# Altium PCB slave.PcbDoc (part 8 of 8)
Units mm, origin at the board's own origin, x right, y up, seen from the top; angles counter-clockwise.
Board outline 160 x 100 mm, 6 copper layers (Top, FUSED_VBAT-, Signals1, Signals2, SUPPLY, Bottom), stack 1.67 mm thick; 582 components, 375 nets, 1615 pads, 3043 vias.
Unrouted connection lines stored in the file: 1.
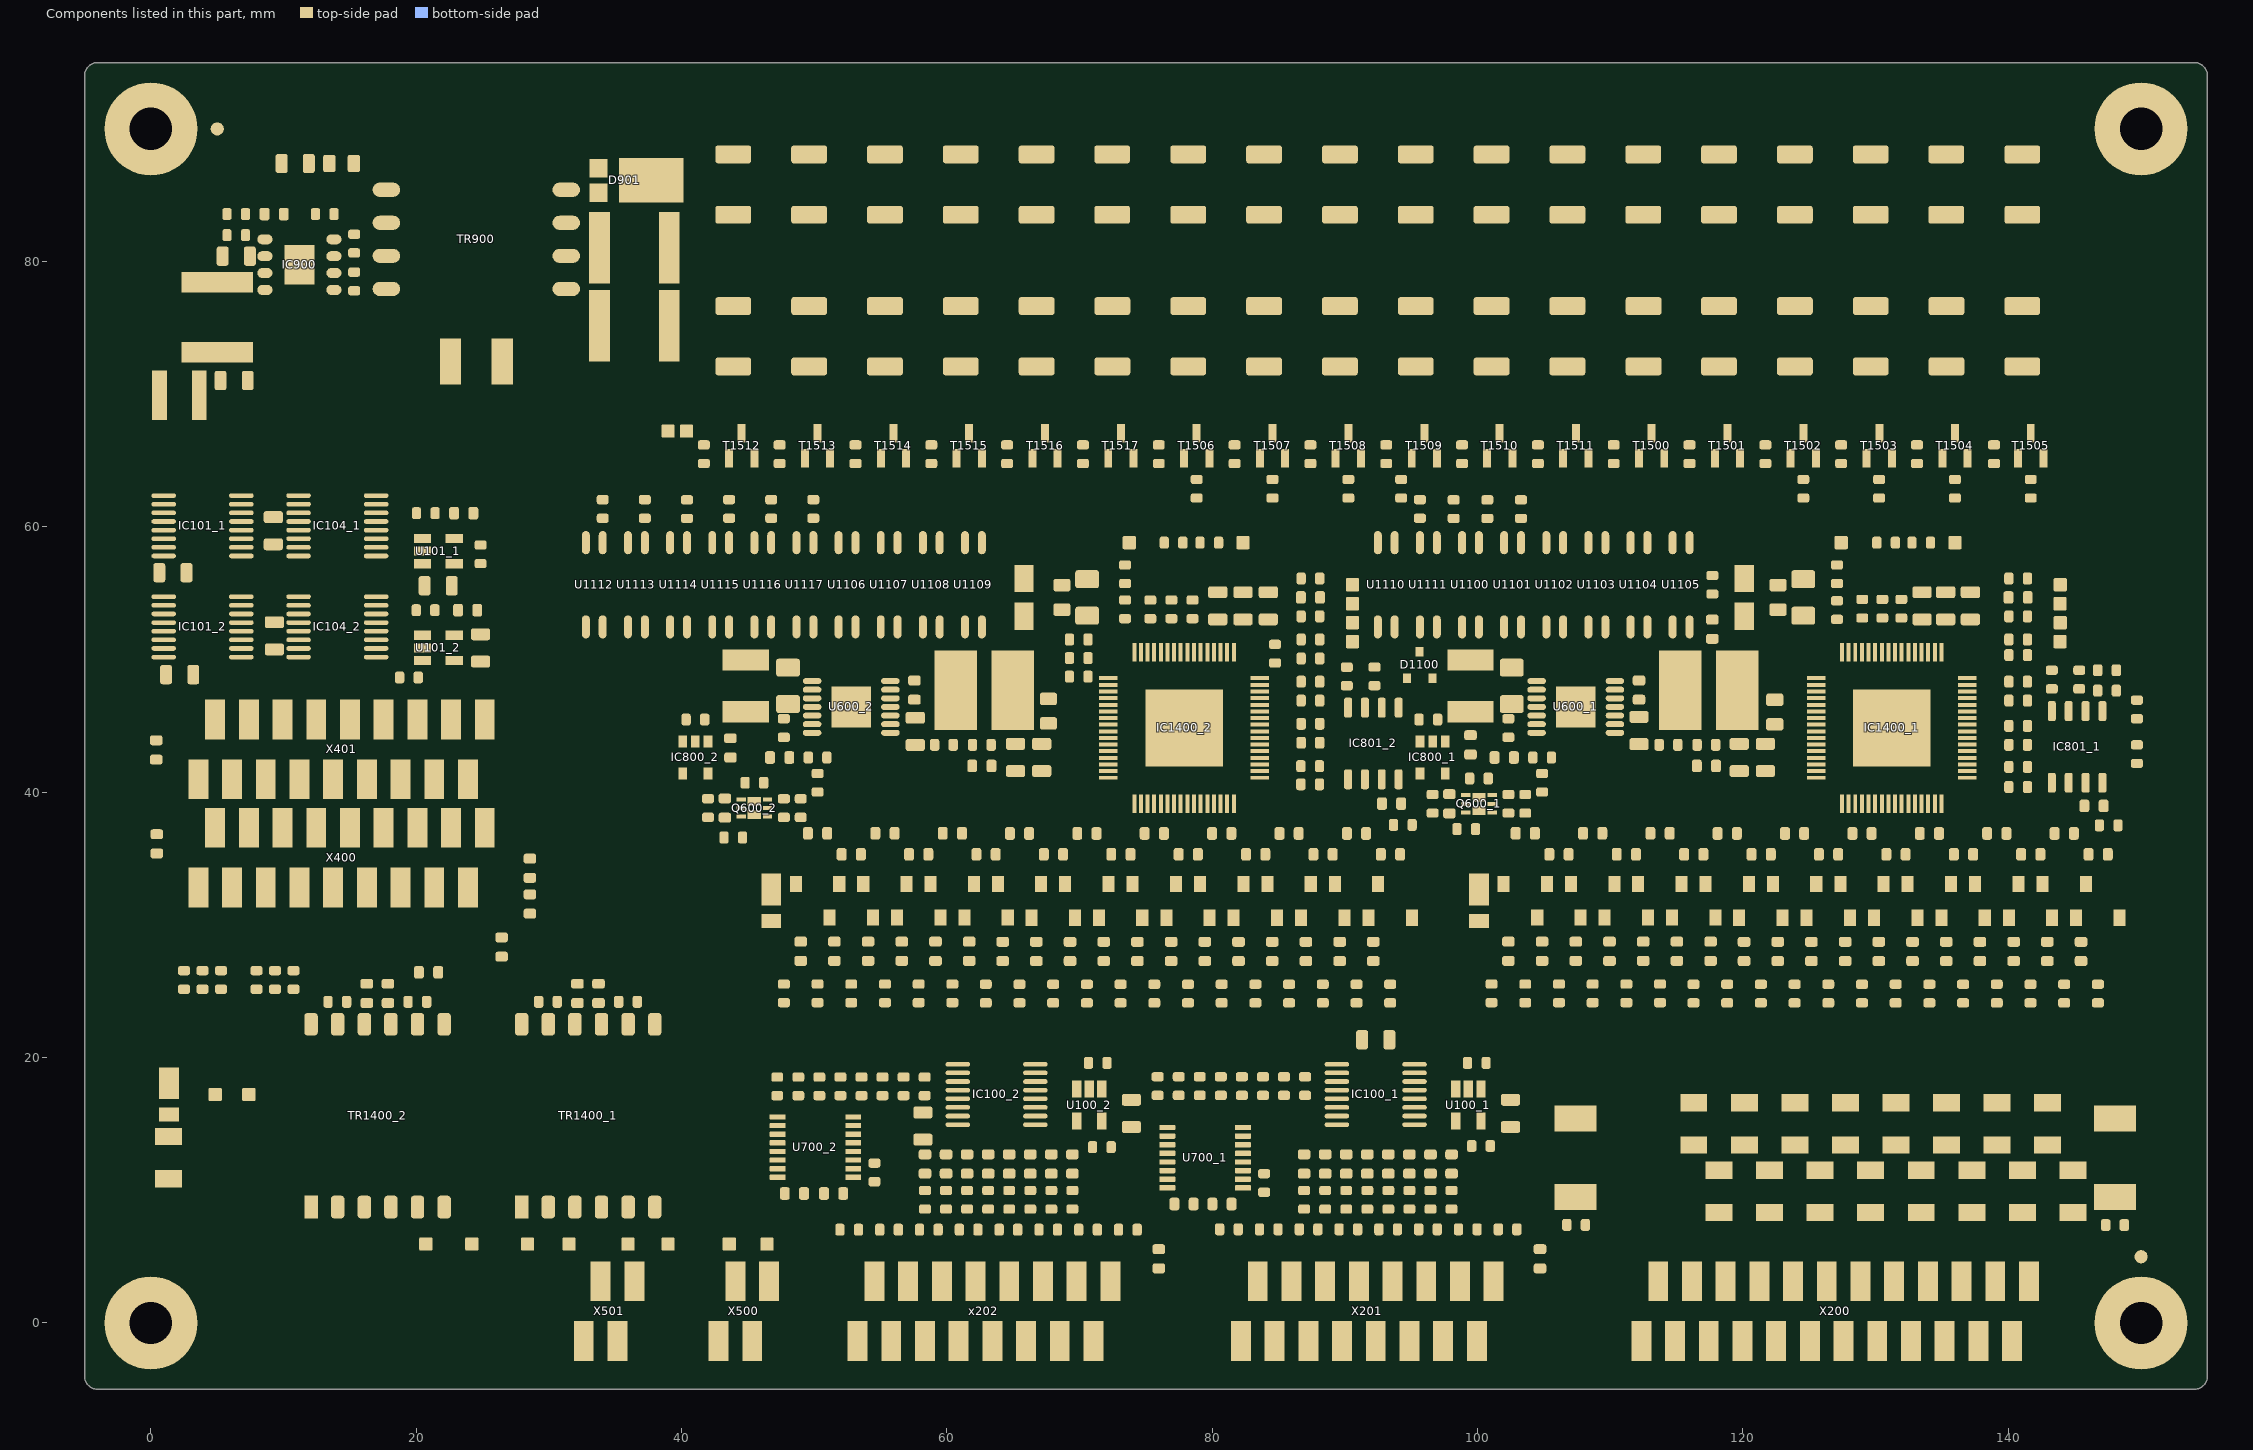
[diagram p11: the components of this part, seen from the top]

## Via types
v1: diameter 0.55, hole 0.3, Top to Bottom, tented both sides, 2963 vias
v2: diameter 0.55, hole 0.3, Top to Bottom, 41 vias
v3: diameter 0.75, hole 0.5, Top to Bottom, tented both sides, 22 vias
v4: diameter 0.65, hole 0.4, Top to Bottom, tented both sides, 16 vias
v5: diameter 0.75, hole 0.5, Top to Bottom, 1 vias

## Nets (pads, with @x,y where several pads share a name; then routed paths per layer and width w, separated by ;. In a path a pad name is that pad's centre, name@x,y a point inside that pad or via, vN(x,y) a via of type N, cw(c..) or ccw(c..) an arc to the next point about the centre after c; other vN are vias at no path point) (continued)
copper on no net:
  other v1: 41.996,75.51 42.758,75.51 45.044,75.51 48.092,75.51 48.854,75.51 41.996,77.034 42.377,77.796 43.139,77.796 43.901,77.796 44.663,77.796 45.425,77.796 48.473,77.796 49.235,77.796 49.997,77.796 50.759,77.796 51.521,77.796 41.996,78.558 42.758,78.558 43.52,78.558 44.282,78.558 45.044,78.558 45.806,78.558 48.092,78.558 48.854,78.558 49.616,78.558 50.378,78.558 51.14,78.558 42.377,79.32 43.139,79.32 43.901,79.32 44.663,79.32 45.425,79.32 48.473,79.32 49.235,79.32 49.997,79.32 50.759,79.32 51.521,79.32 41.996,80.082 42.758,80.082 43.52,80.082 44.282,80.082 45.044,80.082 45.806,80.082 48.092,80.082 48.854,80.082 49.616,80.082 50.378,80.082 51.14,80.082 42.377,80.844 43.139,80.844 43.901,80.844 44.663,80.844 45.425,80.844 48.473,80.844 49.235,80.844 49.997,80.844 50.759,80.844 51.521,80.844 41.996,81.606 42.758,81.606 43.52,81.606 44.282,81.606 45.044,81.606 45.806,81.606 48.092,81.606 48.854,81.606 49.616,81.606 50.378,81.606 51.14,81.606 42.377,82.368 43.139,82.368 43.901,82.368 44.663,82.368 45.425,82.368 48.473,82.368 49.235,82.368 49.997,82.368 50.759,82.368 51.521,82.368 41.996,83.13 45.806,83.13 51.521,83.892 41.996,84.654 42.758,84.654 43.52,84.654 44.282,84.654 45.044,84.654 45.806,84.654 48.092,84.654 48.854,84.654 49.616,84.654 50.378,84.654 51.14,84.654

## Polygon pours and split planes (outlines as drawn)
+5.0V_VREG_2 on SUPPLY "Polygon_1_Net_+5.0V_VREG_1" (solid, remove dead copper, pour order 222): 0.086,27.06 12.151,27.06 47.076,27.06 47.076,8.962 50.886,8.962 50.886,-5.008 74.381,-5.008 74.381,26.742 95.653,26.742 95.653,58.81 43.901,58.81 43.901,29.6 0.086,29.6
+5.0V_VREG_1 on SUPPLY "Polygon_1_Net_+5.0V_VREG_0" (solid, remove dead copper, pour order 223): 17 vertices, not listed, extent 0.086,-5.193 155.39,64.262
+5.0V_VREG_2 on SUPPLY "SUPPLY-+5.0V_VREG_1" (solid, pour order 811): 0.086,54.682 27.708,54.682 27.708,48.332 39.773,48.332 39.773,40.712 0.086,40.712
FUSED_VBAT- on Top "Top-FUSED_VBAT-" (solid, pour order 787): 18 vertices, not listed, extent 42.631,39.76 68.031,50.872
VIN_2 on Top "Top-EXT_DC_ISO+" (solid, pour order 789): 42.631,47.38 50.568,47.38 50.568,46.745 48.663,46.745 48.663,45.157 42.631,45.157
no net on Top "Polygon_1_Net_N$4" (solid, pour order 381): 52.156,85.162 52.156,75.002 47.076,75.002 47.076,85.162
FUSED_VBAT- on Top "Top-FUSED_VBAT-" (solid, pour order 807): 18 vertices, not listed, extent 97.241,39.76 122.641,50.872
no net on Top "Polygon_1_Net_N$4" (solid, pour order 383): 46.441,85.162 46.441,75.002 41.361,75.002 41.361,85.162
NetC605_1_2 on Top "Top-NetC1505_2_2" (solid, pour order 803): 119.466,44.205 120.736,44.205 120.736,45.792 123.276,45.792 123.276,43.252 119.466,43.252
EXT_DC_ISO+ on Top "Polygon_1_Net_EXT_DC_ISO+" (solid, pour order 755): 40.408,88.655 40.408,68.652 35.963,68.652 35.963,84.527 35.328,84.527 35.328,88.655
NetC900_2 on Top "Polygon_1_Net_N$74" (solid, remove dead copper, pour order 779): 5.801,71.827 5.801,67.858 2.943,67.858 2.943,71.827
NetC902_2 on Top "Polygon_1_Net_N$1254" (solid, remove dead copper, pour order 761): 21 vertices, not listed, extent -0.232,67.858 18.818,88.337
FUSED_VBAT- on Top "Polygon_2_Net_FUSED_VBAT-" (solid, pour order 759): 34.693,83.892 34.693,68.652 25.486,68.652 25.486,74.367 29.931,74.367 29.931,78.812 33.106,78.812 33.106,83.892
EXT_DC_IN- on Top "Polygon_1_Net_EXT_DC_IN-" (solid, remove dead copper, pour order 753): 9.928,78.495 9.928,84.21 12.405,84.21 12.405,74.685 23.581,74.685 23.581,70.24 6.277,70.24 6.277,72.145 2.15,72.145 2.15,75.796 8.023,75.796 8.023,78.495
+5.0V_VREG_2 on Top "Top-+5.0V_VREG_1" (solid, pour order 797): 62.951,50.872 62.951,41.347 63.903,41.347 63.903,44.522 65.808,44.522 65.808,46.427 68.666,46.427 68.666,50.872
EXT_DC_ISO+ on Top "Top-EXT_DC_ISO+ 1" (solid, pour order 821): 41.376,40.077 44.218,40.077 44.218,41.347 45.171,41.347 45.171,40.077 44.853,40.077 44.853,39.125 41.376,39.125
VIN_2 on Top "Top-VIN_2" (solid, pour order 823): 44.945,39.76 45.488,39.76 45.488,41.347 47.076,41.347 47.076,39.125 46.123,39.125 46.123,38.807 44.945,38.807
EXT_DC_ISO+ on Top "Top-EXT_DC_ISO+ 2" (solid, pour order 819): 95.986,40.395 98.828,40.395 98.828,41.665 99.781,41.665 99.781,40.395 99.463,40.395 99.463,39.442 95.986,39.442
VIN_1 on Top "Top-VIN_1" (solid, pour order 817): 99.555,40.077 100.098,40.077 100.098,41.665 101.686,41.665 101.686,39.442 100.733,39.442 100.733,39.125 99.555,39.125
VIN_1 on Top "Top-EXT_DC_ISO+" (solid, pour order 799): 97.241,47.38 105.178,47.38 105.178,46.745 103.273,46.745 103.273,45.157 97.241,45.157 97.241,46.745
+5.0V_VREG_1 on Top "Top-+5.0V_VREG_1" (solid, pour order 801): 117.561,50.872 117.561,41.347 118.513,41.347 118.513,44.522 120.418,44.522 120.418,46.427 123.276,46.427 123.276,50.872
SW_2 on Top "Top-SW_2" (solid, pour order 815): 55.013,48.967 58.823,48.967 58.823,50.872 61.681,50.872 61.681,44.522 58.823,44.522 58.823,47.697 56.601,47.697 56.601,46.745 55.013,46.745
SW_1 on Top "Top-SW_2" (solid, pour order 805): 109.623,48.967 113.433,48.967 113.433,50.872 116.291,50.872 116.291,44.522 113.433,44.522 113.433,47.697 111.211,47.697 111.211,46.745 109.623,46.745
CELL_FEEDBACK.CELL17_FEEDBACK+ on Top "Polygon_1_Net_CELL0_FEEDBACK+" (solid, pour order 417): 46.441,66.747 41.361,66.747 41.361,73.732 46.441,73.732
NetC605_2_2 on Top "Top-NetC1505_2_2" (solid, pour order 793): 64.856,44.205 66.126,44.205 66.126,45.792 68.666,45.792 68.666,43.252 64.856,43.252
NetIC900_5 on Top "Polygon_1_Net_N$80" (solid, remove dead copper, pour order 763): 21.358,76.59 21.358,88.337 14.691,88.337 14.691,86.432 19.453,86.432 19.453,81.352 16.596,81.352 16.596,78.495 13.103,78.495 13.103,76.59
NetD901_2 on Top "Polygon_1_Net_N$84" (solid, remove dead copper, pour order 757): 34.376,88.655 34.376,84.527 29.931,84.527 29.931,88.655
NetC905_1 on Top "Polygon_1_Net_N$92" (solid, remove dead copper, pour order 751): 11.198,88.337 11.198,86.432 14.056,86.432 14.056,88.337
NetTR900_6 on Top "Polygon_1_Net_N$74" (solid, remove dead copper, pour order 745): 32.471,83.892 32.471,79.447 29.931,79.447 29.931,83.892
CELL_FEEDBACK.CELL0_FEEDBACK+ on Top "Polygon_1_Net_FUSED_CELL_0-" (solid, pour order 193): 143.596,86.432 138.516,86.432 138.516,93.417 143.596,93.417
FUSED_CELL.CELL_12+ on Top "Polygon_1_Net_N$4" (solid, pour order 375): 69.301,85.162 69.301,75.002 64.221,75.002 64.221,85.162
CELL_FEEDBACK.CELL1_FEEDBACK+ on Top "Polygon_1_Net_CELL0_FEEDBACK+" (solid, pour order 385): 137.881,66.747 132.801,66.747 132.801,73.732 137.881,73.732
CELL_FEEDBACK.CELL0_FEEDBACK+ on Top "Polygon_1_Net_CELL0_FEEDBACK+" (solid, pour order 185): 143.596,66.747 138.516,66.747 138.516,73.732 143.596,73.732
CELL_FEEDBACK.CELL16_FEEDBACK+ on Top "Polygon_1_Net_CELL0_FEEDBACK+" (solid, pour order 415): 52.156,66.747 47.076,66.747 47.076,73.732 52.156,73.732
FUSED_CELL.CELL_0- on Top "Polygon_1_Net_N$4" (solid, pour order 214): 143.596,85.162 143.596,75.002 138.516,75.002 138.516,85.162
CELL_FEEDBACK.CELL13_FEEDBACK+ on Top "Polygon_1_Net_CELL0_FEEDBACK+" (solid, pour order 409): 69.301,66.747 64.221,66.747 64.221,73.732 69.301,73.732
CELL_FEEDBACK.CELL14_FEEDBACK+ on Top "Polygon_1_Net_CELL0_FEEDBACK+" (solid, pour order 411): 63.586,66.747 58.506,66.747 58.506,73.732 63.586,73.732
CELL_FEEDBACK.CELL12_FEEDBACK+ on Top "Polygon_1_Net_CELL0_FEEDBACK+" (solid, pour order 407): 75.016,66.747 69.936,66.747 69.936,73.732 75.016,73.732
CELL_FEEDBACK.CELL11_FEEDBACK+ on Top "Polygon_1_Net_CELL0_FEEDBACK+" (solid, pour order 405): 80.731,66.747 75.651,66.747 75.651,73.732 80.731,73.732
CELL_FEEDBACK.CELL9_FEEDBACK+ on Top "Polygon_1_Net_CELL0_FEEDBACK+" (solid, pour order 401): 92.161,66.747 87.081,66.747 87.081,73.732 92.161,73.732
CELL_FEEDBACK.CELL8_FEEDBACK+ on Top "Polygon_1_Net_CELL0_FEEDBACK+" (solid, pour order 399): 97.878,66.747 92.798,66.747 92.798,73.732 97.878,73.732
CELL_FEEDBACK.CELL7_FEEDBACK+ on Top "Polygon_1_Net_CELL0_FEEDBACK+" (solid, pour order 397): 103.591,66.747 98.511,66.747 98.511,73.732 103.591,73.732
CELL_FEEDBACK.CELL6_FEEDBACK+ on Top "Polygon_1_Net_CELL0_FEEDBACK+" (solid, pour order 395): 109.309,66.747 104.229,66.747 104.229,73.732 109.309,73.732
CELL_FEEDBACK.CELL5_FEEDBACK+ on Top "Polygon_1_Net_CELL0_FEEDBACK+" (solid, pour order 393): 115.021,66.747 109.941,66.747 109.941,73.732 115.021,73.732
CELL_FEEDBACK.CELL4_FEEDBACK+ on Top "Polygon_1_Net_CELL0_FEEDBACK+" (solid, pour order 391): 120.736,66.747 115.656,66.747 115.656,73.732 120.736,73.732
CELL_FEEDBACK.CELL3_FEEDBACK+ on Top "Polygon_1_Net_CELL0_FEEDBACK+" (solid, pour order 389): 126.451,66.747 121.371,66.747 121.371,73.732 126.451,73.732
CELL_FEEDBACK.CELL2_FEEDBACK+ on Top "Polygon_1_Net_CELL0_FEEDBACK+" (solid, pour order 387): 132.166,66.747 127.086,66.747 127.086,73.732 132.166,73.732
CELL_FEEDBACK.CELL15_FEEDBACK+ on Top "Polygon_1_Net_CELL0_FEEDBACK+" (solid, pour order 413): 57.871,66.747 52.791,66.747 52.791,73.732 57.871,73.732
CELL_FEEDBACK.CELL10_FEEDBACK+ on Top "Polygon_1_Net_CELL0_FEEDBACK+" (solid, pour order 403): 86.446,66.747 81.366,66.747 81.366,73.732 86.446,73.732
FUSED_CELL.CELL_14+ on Top "Polygon_1_Net_N$4" (solid, pour order 379): 57.871,85.162 57.871,75.002 52.791,75.002 52.791,85.162
FUSED_CELL.CELL_13+ on Top "Polygon_1_Net_N$4" (solid, pour order 377): 63.586,85.162 63.586,75.002 58.506,75.002 58.506,85.162
FUSED_CELL.CELL_11+ on Top "Polygon_1_Net_N$4" (solid, pour order 373): 75.016,85.162 75.016,75.002 69.936,75.002 69.936,85.162
FUSED_CELL.CELL_10+ on Top "Polygon_1_Net_N$4" (solid, pour order 371): 80.731,85.162 80.731,75.002 75.651,75.002 75.651,85.162
FUSED_CELL.CELL_9+ on Top "Polygon_1_Net_N$4" (solid, pour order 369): 86.446,85.162 86.446,75.002 81.366,75.002 81.366,85.162
FUSED_CELL.CELL_8+ on Top "Polygon_1_Net_N$4" (solid, pour order 367): 92.161,85.162 92.161,75.002 87.081,75.002 87.081,85.162
FUSED_CELL.CELL_7+ on Top "Polygon_1_Net_N$4" (solid, pour order 365): 97.876,85.162 97.876,75.002 92.796,75.002 92.796,85.162
FUSED_CELL.CELL_6+ on Top "Polygon_1_Net_N$4" (solid, pour order 363): 103.591,85.162 103.591,75.002 98.511,75.002 98.511,85.162
FUSED_CELL.CELL_5+ on Top "Polygon_1_Net_N$4" (solid, pour order 361): 109.309,85.162 109.309,75.002 104.229,75.002 104.229,85.162
FUSED_CELL.CELL_4+ on Top "Polygon_1_Net_N$4" (solid, pour order 359): 115.021,85.162 115.021,75.002 109.941,75.002 109.941,85.162
FUSED_CELL.CELL_3+ on Top "Polygon_1_Net_N$4" (solid, pour order 357): 120.736,85.162 120.736,75.002 115.656,75.002 115.656,85.162
FUSED_CELL.CELL_2+ on Top "Polygon_1_Net_N$4" (solid, pour order 355): 126.451,85.162 126.451,75.002 121.371,75.002 121.371,85.162
FUSED_CELL.CELL_1+ on Top "Polygon_1_Net_N$4" (solid, pour order 353): 132.166,85.162 132.166,75.002 127.086,75.002 127.086,85.162
FUSED_CELL.CELL_0+ on Top "Polygon_1_Net_N$4" (solid, pour order 351): 137.881,85.162 137.881,75.002 132.801,75.002 132.801,85.162
CELL_FEEDBACK.CELL17_FEEDBACK+ on Top "Polygon_1_Net_FUSED_CELL_0-" (solid, pour order 349): 46.441,86.432 41.361,86.432 41.361,93.417 46.441,93.417
CELL_FEEDBACK.CELL16_FEEDBACK+ on Top "Polygon_1_Net_FUSED_CELL_0-" (solid, pour order 347): 52.156,86.432 47.076,86.432 47.076,93.417 52.156,93.417
CELL_FEEDBACK.CELL15_FEEDBACK+ on Top "Polygon_1_Net_FUSED_CELL_0-" (solid, pour order 345): 57.871,86.432 52.791,86.432 52.791,93.417 57.871,93.417
CELL_FEEDBACK.CELL14_FEEDBACK+ on Top "Polygon_1_Net_FUSED_CELL_0-" (solid, pour order 343): 63.586,86.432 58.506,86.432 58.506,93.417 63.586,93.417
CELL_FEEDBACK.CELL13_FEEDBACK+ on Top "Polygon_1_Net_FUSED_CELL_0-" (solid, pour order 341): 69.301,86.432 64.221,86.432 64.221,93.417 69.301,93.417
CELL_FEEDBACK.CELL12_FEEDBACK+ on Top "Polygon_1_Net_FUSED_CELL_0-" (solid, pour order 339): 75.016,86.432 69.936,86.432 69.936,93.417 75.016,93.417
CELL_FEEDBACK.CELL11_FEEDBACK+ on Top "Polygon_1_Net_FUSED_CELL_0-" (solid, pour order 337): 80.731,86.432 75.651,86.432 75.651,93.417 80.731,93.417
CELL_FEEDBACK.CELL10_FEEDBACK+ on Top "Polygon_1_Net_FUSED_CELL_0-" (solid, pour order 335): 86.446,86.432 81.366,86.432 81.366,93.417 86.446,93.417
CELL_FEEDBACK.CELL9_FEEDBACK+ on Top "Polygon_1_Net_FUSED_CELL_0-" (solid, pour order 333): 92.161,86.432 87.081,86.432 87.081,93.417 92.161,93.417
CELL_FEEDBACK.CELL8_FEEDBACK+ on Top "Polygon_1_Net_FUSED_CELL_0-" (solid, pour order 331): 97.876,86.432 92.796,86.432 92.796,93.417 97.876,93.417
CELL_FEEDBACK.CELL7_FEEDBACK+ on Top "Polygon_1_Net_FUSED_CELL_0-" (solid, pour order 329): 103.591,86.432 98.511,86.432 98.511,93.417 103.591,93.417
CELL_FEEDBACK.CELL6_FEEDBACK+ on Top "Polygon_1_Net_FUSED_CELL_0-" (solid, pour order 327): 109.306,86.432 104.226,86.432 104.226,93.417 109.306,93.417
CELL_FEEDBACK.CELL5_FEEDBACK+ on Top "Polygon_1_Net_FUSED_CELL_0-" (solid, pour order 325): 115.021,86.432 109.941,86.432 109.941,93.417 115.021,93.417
CELL_FEEDBACK.CELL4_FEEDBACK+ on Top "Polygon_1_Net_FUSED_CELL_0-" (solid, pour order 323): 120.736,86.432 115.656,86.432 115.656,93.417 120.736,93.417
CELL_FEEDBACK.CELL3_FEEDBACK+ on Top "Polygon_1_Net_FUSED_CELL_0-" (solid, pour order 321): 126.451,86.432 121.371,86.432 121.371,93.417 126.451,93.417
CELL_FEEDBACK.CELL2_FEEDBACK+ on Top "Polygon_1_Net_FUSED_CELL_0-" (solid, pour order 319): 132.166,86.432 127.086,86.432 127.086,93.417 132.166,93.417
CELL_FEEDBACK.CELL1_FEEDBACK+ on Top "Polygon_1_Net_FUSED_CELL_0-" (solid, pour order 317): 137.881,86.432 132.801,86.432 132.801,93.417 137.881,93.417
no net on Top Overlay "Polygon_1_NoNet" (solid): 154.391,53.73 147.406,53.73 147.406,75.478 154.391,75.478
no net on Top Overlay "Polygon_22_NoNet" (solid): 105 vertices, not listed, extent 18.449,62.784 35.594,68.32
no net on Top Overlay "Polygon_23_NoNet" (solid): 75 vertices, not listed, extent 31.793,64.279 33.541,66.833
no net on Top Overlay "Polygon_24_NoNet" (solid): 33 vertices, not listed, extent 29.069,64.286 31.289,66.827
no net on Top Overlay "Polygon_25_NoNet" (solid): 69 vertices, not listed, extent 26.774,64.3 28.554,66.812
no net on Top Overlay "Polygon_26_NoNet" (solid): 53 vertices, not listed, extent 23.7,64.276 25.93,66.499
no net on Top Overlay "Polygon_27_NoNet" (solid): 60 vertices, not listed, extent 21.687,64.272 23.709,66.499
no net on Top Overlay "Polygon_28_NoNet" (solid): 61 vertices, not listed, extent 19.715,63.5 21.943,67.318
no net on Top Overlay "Polygon_42_NoNet" (solid): 33 vertices, not listed, extent -3.656,48.412 -3.124,48.94
no net on Top Overlay "Polygon_41_NoNet" (solid): 17 vertices, not listed, extent -3.053,48.176 -1.296,49.176
no net on Top Overlay "Polygon_40_NoNet" (solid): 133 vertices, not listed, extent -4.296,46.857 -0.657,50.495
no net on Top Overlay "Polygon_39_NoNet" (solid): 59 vertices, not listed, extent -3.05,44.499 -1.902,45.542
no net on Top Overlay "Polygon_38_NoNet" (solid): 58 vertices, not listed, extent -3.05,43.453 -1.902,44.497
no net on Top Overlay "Polygon_37_NoNet" (solid): 134 vertices, not listed, extent -4.294,42.676 -0.657,46.314
FUSED_VBAT- on Bottom "Polygon_3_Net_FUSED_VBAT-" (solid, remove dead copper, pour order 278): 123.593,37.22 123.593,52.46 138.833,52.46 138.833,37.22
FUSED_VBAT- on Bottom "Polygon_3_Net_FUSED_VBAT-" (solid, pour order 769): 34.693,83.892 34.693,68.652 25.486,68.652 25.486,74.367 29.931,74.367 29.931,78.812 32.895,78.812 32.895,83.892
no net on Bottom "Polygon_1_Net_N$4" (solid, pour order 673): 52.156,85.162 52.156,75.002 47.076,75.002 47.076,85.162
EXT_DC_ISO+ on Bottom "Polygon_6_Net_EXT_DC_ISO+" (solid, remove dead copper, pour order 771): 40.408,88.655 40.408,68.652 35.963,68.652 35.963,84.21 35.011,84.21 35.011,88.655
FUSED_VBAT- on Bottom "Polygon_2_Net_FUSED_VBAT-" (solid, remove dead copper, pour order 279): 70.253,37.22 70.253,52.46 85.493,52.46 85.493,37.22
EXT_DC_IN- on Bottom "Polygon_2_Net_EXT_DC_IN-" (solid, pour order 773): 21.358,70.24 21.358,88.337 9.293,88.337 9.293,86.115 1.356,86.115 1.356,82.305 -0.232,82.305 -0.232,70.24
NetD901_2 on Bottom "Polygon_2_Net_N$84" (solid, pour order 767): 34.693,88.655 34.693,84.21 29.931,84.21 29.931,88.655
NetTR900_6 on Bottom "Polygon_2_Net_N$74" (solid, pour order 765): 32.471,83.892 32.471,79.447 29.931,79.447 29.931,83.892
CELL_FEEDBACK.CELL0_FEEDBACK+ on Bottom "Polygon_1_Net_FUSED_CELL_0-" (solid, pour order 739): 143.596,86.432 138.516,86.432 138.516,93.417 143.596,93.417
FUSED_CELL.CELL_12+ on Bottom "Polygon_1_Net_N$4" (solid, pour order 679): 69.301,85.162 69.301,75.002 64.221,75.002 64.221,85.162
FUSED_CELL.CELL_0- on Bottom "Polygon_1_Net_N$4" (solid, pour order 741): 143.596,85.162 143.596,75.002 138.516,75.002 138.516,85.162
CELL_FEEDBACK.CELL0_FEEDBACK+ on Bottom "Polygon_1_Net_CELL0_FEEDBACK+" (solid, pour order 743): 143.596,66.747 138.516,66.747 138.516,73.732 143.596,73.732
CELL_FEEDBACK.CELL1_FEEDBACK+ on Bottom "Polygon_1_Net_FUSED_CELL_0-" (solid, pour order 737): 137.881,86.432 132.801,86.432 132.801,93.417 137.881,93.417
CELL_FEEDBACK.CELL2_FEEDBACK+ on Bottom "Polygon_1_Net_FUSED_CELL_0-" (solid, pour order 735): 132.166,86.432 127.086,86.432 127.086,93.417 132.166,93.417
CELL_FEEDBACK.CELL3_FEEDBACK+ on Bottom "Polygon_1_Net_FUSED_CELL_0-" (solid, pour order 733): 126.451,86.432 121.371,86.432 121.371,93.417 126.451,93.417
CELL_FEEDBACK.CELL4_FEEDBACK+ on Bottom "Polygon_1_Net_FUSED_CELL_0-" (solid, pour order 731): 120.736,86.432 115.656,86.432 115.656,93.417 120.736,93.417
CELL_FEEDBACK.CELL5_FEEDBACK+ on Bottom "Polygon_1_Net_FUSED_CELL_0-" (solid, pour order 729): 115.021,86.432 109.941,86.432 109.941,93.417 115.021,93.417
CELL_FEEDBACK.CELL6_FEEDBACK+ on Bottom "Polygon_1_Net_FUSED_CELL_0-" (solid, pour order 727): 109.306,86.432 104.226,86.432 104.226,93.417 109.306,93.417
CELL_FEEDBACK.CELL7_FEEDBACK+ on Bottom "Polygon_1_Net_FUSED_CELL_0-" (solid, pour order 725): 103.591,86.432 98.511,86.432 98.511,93.417 103.591,93.417
CELL_FEEDBACK.CELL8_FEEDBACK+ on Bottom "Polygon_1_Net_FUSED_CELL_0-" (solid, pour order 723): 97.876,86.432 92.796,86.432 92.796,93.417 97.876,93.417
CELL_FEEDBACK.CELL9_FEEDBACK+ on Bottom "Polygon_1_Net_FUSED_CELL_0-" (solid, pour order 721): 92.161,86.432 87.081,86.432 87.081,93.417 92.161,93.417
CELL_FEEDBACK.CELL10_FEEDBACK+ on Bottom "Polygon_1_Net_FUSED_CELL_0-" (solid, pour order 719): 86.446,86.432 81.366,86.432 81.366,93.417 86.446,93.417
CELL_FEEDBACK.CELL11_FEEDBACK+ on Bottom "Polygon_1_Net_FUSED_CELL_0-" (solid, pour order 717): 80.731,86.432 75.651,86.432 75.651,93.417 80.731,93.417
CELL_FEEDBACK.CELL12_FEEDBACK+ on Bottom "Polygon_1_Net_FUSED_CELL_0-" (solid, pour order 715): 75.016,86.432 69.936,86.432 69.936,93.417 75.016,93.417
CELL_FEEDBACK.CELL13_FEEDBACK+ on Bottom "Polygon_1_Net_FUSED_CELL_0-" (solid, pour order 713): 69.301,86.432 64.221,86.432 64.221,93.417 69.301,93.417
CELL_FEEDBACK.CELL14_FEEDBACK+ on Bottom "Polygon_1_Net_FUSED_CELL_0-" (solid, pour order 711): 63.586,86.432 58.506,86.432 58.506,93.417 63.586,93.417
CELL_FEEDBACK.CELL15_FEEDBACK+ on Bottom "Polygon_1_Net_FUSED_CELL_0-" (solid, pour order 709): 57.871,86.432 52.791,86.432 52.791,93.417 57.871,93.417
CELL_FEEDBACK.CELL16_FEEDBACK+ on Bottom "Polygon_1_Net_FUSED_CELL_0-" (solid, pour order 707): 52.156,86.432 47.076,86.432 47.076,93.417 52.156,93.417
CELL_FEEDBACK.CELL17_FEEDBACK+ on Bottom "Polygon_1_Net_FUSED_CELL_0-" (solid, pour order 705): 46.441,86.432 41.361,86.432 41.361,93.417 46.441,93.417
FUSED_CELL.CELL_0+ on Bottom "Polygon_1_Net_N$4" (solid, pour order 703): 137.881,85.162 137.881,75.002 132.801,75.002 132.801,85.162
FUSED_CELL.CELL_1+ on Bottom "Polygon_1_Net_N$4" (solid, pour order 701): 132.166,85.162 132.166,75.002 127.086,75.002 127.086,85.162
FUSED_CELL.CELL_2+ on Bottom "Polygon_1_Net_N$4" (solid, pour order 699): 126.451,85.162 126.451,75.002 121.371,75.002 121.371,85.162
FUSED_CELL.CELL_3+ on Bottom "Polygon_1_Net_N$4" (solid, pour order 697): 120.736,85.162 120.736,75.002 115.656,75.002 115.656,85.162
FUSED_CELL.CELL_4+ on Bottom "Polygon_1_Net_N$4" (solid, pour order 695): 115.021,85.162 115.021,75.002 109.941,75.002 109.941,85.162
FUSED_CELL.CELL_5+ on Bottom "Polygon_1_Net_N$4" (solid, pour order 693): 109.309,85.162 109.309,75.002 104.229,75.002 104.229,85.162
FUSED_CELL.CELL_6+ on Bottom "Polygon_1_Net_N$4" (solid, pour order 691): 103.591,85.162 103.591,75.002 98.511,75.002 98.511,85.162
FUSED_CELL.CELL_7+ on Bottom "Polygon_1_Net_N$4" (solid, pour order 689): 97.876,85.162 97.876,75.002 92.796,75.002 92.796,85.162
FUSED_CELL.CELL_8+ on Bottom "Polygon_1_Net_N$4" (solid, pour order 687): 92.161,85.162 92.161,75.002 87.081,75.002 87.081,85.162
FUSED_CELL.CELL_9+ on Bottom "Polygon_1_Net_N$4" (solid, pour order 685): 86.446,85.162 86.446,75.002 81.366,75.002 81.366,85.162
FUSED_CELL.CELL_10+ on Bottom "Polygon_1_Net_N$4" (solid, pour order 683): 80.731,85.162 80.731,75.002 75.651,75.002 75.651,85.162
FUSED_CELL.CELL_11+ on Bottom "Polygon_1_Net_N$4" (solid, pour order 681): 75.016,85.162 75.016,75.002 69.936,75.002 69.936,85.162
FUSED_CELL.CELL_13+ on Bottom "Polygon_1_Net_N$4" (solid, pour order 677): 63.586,85.162 63.586,75.002 58.506,75.002 58.506,85.162
FUSED_CELL.CELL_14+ on Bottom "Polygon_1_Net_N$4" (solid, pour order 675): 57.871,85.162 57.871,75.002 52.791,75.002 52.791,85.162
no net on Bottom "Polygon_1_Net_N$4" (solid, pour order 671): 46.441,85.162 46.441,75.002 41.361,75.002 41.361,85.162
CELL_FEEDBACK.CELL10_FEEDBACK+ on Bottom "Polygon_1_Net_CELL0_FEEDBACK+" (solid, pour order 669): 86.446,66.747 81.366,66.747 81.366,73.732 86.446,73.732
CELL_FEEDBACK.CELL15_FEEDBACK+ on Bottom "Polygon_1_Net_CELL0_FEEDBACK+" (solid, pour order 667): 57.871,66.747 52.791,66.747 52.791,73.732 57.871,73.732
CELL_FEEDBACK.CELL1_FEEDBACK+ on Bottom "Polygon_1_Net_CELL0_FEEDBACK+" (solid, pour order 665): 137.881,66.747 132.801,66.747 132.801,73.732 137.881,73.732
CELL_FEEDBACK.CELL2_FEEDBACK+ on Bottom "Polygon_1_Net_CELL0_FEEDBACK+" (solid, pour order 663): 132.166,66.747 127.086,66.747 127.086,73.732 132.166,73.732
CELL_FEEDBACK.CELL3_FEEDBACK+ on Bottom "Polygon_1_Net_CELL0_FEEDBACK+" (solid, pour order 661): 126.451,66.747 121.371,66.747 121.371,73.732 126.451,73.732
CELL_FEEDBACK.CELL4_FEEDBACK+ on Bottom "Polygon_1_Net_CELL0_FEEDBACK+" (solid, pour order 659): 120.736,66.747 115.656,66.747 115.656,73.732 120.736,73.732
CELL_FEEDBACK.CELL5_FEEDBACK+ on Bottom "Polygon_1_Net_CELL0_FEEDBACK+" (solid, pour order 657): 115.021,66.747 109.941,66.747 109.941,73.732 115.021,73.732
CELL_FEEDBACK.CELL6_FEEDBACK+ on Bottom "Polygon_1_Net_CELL0_FEEDBACK+" (solid, pour order 655): 109.309,66.747 104.229,66.747 104.229,73.732 109.309,73.732
CELL_FEEDBACK.CELL7_FEEDBACK+ on Bottom "Polygon_1_Net_CELL0_FEEDBACK+" (solid, pour order 653): 103.591,66.747 98.511,66.747 98.511,73.732 103.591,73.732
CELL_FEEDBACK.CELL8_FEEDBACK+ on Bottom "Polygon_1_Net_CELL0_FEEDBACK+" (solid, pour order 651): 97.878,66.747 92.798,66.747 92.798,73.732 97.878,73.732
CELL_FEEDBACK.CELL9_FEEDBACK+ on Bottom "Polygon_1_Net_CELL0_FEEDBACK+" (solid, pour order 649): 92.161,66.747 87.081,66.747 87.081,73.732 92.161,73.732
CELL_FEEDBACK.CELL11_FEEDBACK+ on Bottom "Polygon_1_Net_CELL0_FEEDBACK+" (solid, pour order 647): 80.731,66.747 75.651,66.747 75.651,73.732 80.731,73.732
CELL_FEEDBACK.CELL12_FEEDBACK+ on Bottom "Polygon_1_Net_CELL0_FEEDBACK+" (solid, pour order 645): 75.016,66.747 69.936,66.747 69.936,73.732 75.016,73.732
CELL_FEEDBACK.CELL14_FEEDBACK+ on Bottom "Polygon_1_Net_CELL0_FEEDBACK+" (solid, pour order 643): 63.586,66.747 58.506,66.747 58.506,73.732 63.586,73.732
CELL_FEEDBACK.CELL16_FEEDBACK+ on Bottom "Polygon_1_Net_CELL0_FEEDBACK+" (solid, pour order 641): 52.156,66.747 47.076,66.747 47.076,73.732 52.156,73.732
CELL_FEEDBACK.CELL17_FEEDBACK+ on Bottom "Polygon_1_Net_CELL0_FEEDBACK+" (solid, pour order 639): 46.441,66.747 41.361,66.747 41.361,73.732 46.441,73.732
CELL_FEEDBACK.CELL13_FEEDBACK+ on Bottom "Polygon_1_Net_CELL0_FEEDBACK+" (solid, pour order 637): 69.301,66.747 64.221,66.747 64.221,73.732 69.301,73.732
no net on Bottom Overlay "Polygon_21_NoNet" (solid): 150.816,37.898 148.026,37.898 148.025,38.471 149.239,38.471 149.24,39.408 149.695,39.408 149.695,38.471 150.359,38.472 150.36,39.455 150.815,39.454
no net on Bottom Overlay "Polygon_20_NoNet" (solid): 23 vertices, not listed, extent 148.024,39.814 150.141,41.034
no net on Bottom Overlay "Polygon_19_NoNet" (solid): 32 vertices, not listed, extent 147.979,41.168 149.288,42.117
no net on Bottom Overlay "Polygon_18_NoNet" (solid): 49 vertices, not listed, extent 147.994,41.388 150.138,43.03
no net on Bottom Overlay "Polygon_17_NoNet" (solid): 41 vertices, not listed, extent 147.979,43.418 150.093,45.312
no net on Bottom Overlay "Polygon_16_NoNet" (solid): 44 vertices, not listed, extent 148.024,45.84 150.139,47.728
no net on Bottom Overlay "Polygon_15_NoNet" (solid): 43 vertices, not listed, extent 148.025,48.253 151.018,50.147
no net on Bottom Overlay "Polygon_14_NoNet" (solid): 75 vertices, not listed, extent 147.979,50.459 150.142,52.617
no net on Bottom Overlay "Polygon_13_NoNet" (solid): 35 vertices, not listed, extent 148.023,52.728 151.067,54.178
no net on Bottom Overlay "Polygon_12_NoNet" (solid): 68 vertices, not listed, extent 147.975,54.312 150.129,56.245
no net on Bottom Overlay "Polygon_11_NoNet" (solid): 25 vertices, not listed, extent 147.97,56.543 150.199,57.892
no net on Bottom Overlay "Polygon_10_NoNet" (solid): 146.636,54.502 146.636,54.797 145.231,54.796 145.232,54.502
no net on Bottom Overlay "Polygon_9_NoNet" (solid): 146.636,55.135 146.636,55.42 145.231,55.42 145.232,55.136
no net on Bottom Overlay "Polygon_8_NoNet" (solid): 60 vertices, not listed, extent 145.208,55.709 146.659,56.596
no net on Bottom Overlay "Polygon_7_NoNet" (solid): 56 vertices, not listed, extent 145.231,56.863 146.639,57.831
no net on Bottom Overlay "Polygon_6_NoNet" (solid): 152.195,32.388 151.027,32.395 151.047,32.768 151.102,33.32 151.202,34.024 151.277,34.418 151.371,34.834 151.523,35.399 151.681,35.886 151.856,36.342 151.939,36.534 152.198,36.534
no net on Bottom Overlay "Polygon_5_NoNet" (solid): 35 vertices, not listed, extent 150.331,32.39 151.855,36.532
no net on Bottom Overlay "Polygon_4_NoNet" (solid): 35 vertices, not listed, extent 149.228,32.393 151.473,36.531
no net on Bottom Overlay "Polygon_3_NoNet" (solid): 31 vertices, not listed, extent 148.026,32.393 150.966,36.532
no net on Bottom Overlay "Polygon_2_NoNet" (solid): 50 vertices, not listed, extent 148.025,32.763 150.473,36.533
no net on Bottom Overlay "Polygon_1_NoNet" (solid): 24 vertices, not listed, extent 148.026,33.856 150.064,36.532
FUSED_VBAT- on FUSED_VBAT- "FUSED_VBAT--No Net" (solid, pour order 809): 155.026,-5.008 155.026,94.992 29.931,94.992 29.931,64.207 0.086,64.207 0.086,27.06 12.151,27.06 12.151,20.71 47.076,20.71 47.076,8.962 50.886,8.962 50.886,-5.008

## Keep-outs
Keep-Out Layer:
  region: -0.494,85.992 -0.494,3.992 -4.994,3.992 -4.994,85.992
  region: 150.006,94.992 150.006,93.992 0.006,93.992 0.006,94.992
  region: 155.006,85.992 155.006,6.105 150.506,6.105 150.506,85.992
  lines w0.152: -4.994,-4.008 ccw(c-3.994,-4.008) -3.994,-5.008 154.006,-5.008 ccw(c154.006,-4.008) 155.006,-4.008 155.006,93.992 ccw(c154.006,93.992) 154.006,94.992 -3.994,94.992 ccw(c-3.994,93.992) -4.994,93.992 -4.994,-4.008

## Silkscreen, mask and mechanical layers (free items; w line width, h text height)
Top Overlay:
  drawing of 55 lines, arcs and shapes, not listed
  text "galvanic    isolation" at 20.406,91.83 h1.02
  text "↯" at 29.613,89.607 h30.48
  text "isolating / DC/DC Converter" at 8.976,89.29 h1.52
  text "DANGER / high voltage / >60VDC" at 32.788,89.29 h1.52
  text "Passive Cell / Balancing" at 147.565,76.907 h1.52 r90
  text "foxBMS" at -1.502,72.78 h3.05 r90
  text "Analog / Multiplexers" at 7.071,64.842 h1.52
  text "FUSED_VBAT-" at 70.571,59.603 h1.02
  text "+5.0V_VREG_1" at 78.826,59.603 h1.02
  text "FUSED_VBAT-" at 124.546,59.603 h1.02
  text "+5.0V_VREG_0" at 132.642,59.603 h1.02
  text "Primary" at 128.832,56.428 h1.52
  text "Secondary" at 76.286,56.397 h1.52
  text "Fraunhofer IISB / foxBMS BMS-Slave 18-Cell V'.GlobalVersion'" at 147.088,53.73 h1.52 r90
  text "Creative Commons / Attribution 4.0" at -1.502,51.19 h1.27 r90
  text "+3.0V_VREF_2_0 / +3.0V_VREF_1_0 / SDA_0 /           SCL_0" at 146.136,49.665 h1.02
  text "DC/DC Converter" at 52.315,38.458 h1.52
  text "DC/DC Converter" at 107.337,38.299 h1.52
  text "Extension / Pin Headers" at -1.184,33.41 h1.52 r90
  text "Input Filter/Protection" at 152.327,24.647 h1.52 r90
  text "isoSPI / Transformers" at -2.073,21.535 h1.52
  text "↯" at 147.882,20.868 h30.48
  text "foxBMS" at 44.958,19.916 h5 r90
  text "galvanic / isolation" at 4.848,18.805 h1.02
  text "C_17+" at 110.576,18.805 h1.02 r90
  text "C_16+" at 112.481,18.805 h1.02 r90
  text "C_15+" at 114.386,18.805 h1.02 r90
  text "C_14+" at 116.291,18.805 h1.02 r90
  text "C_13+" at 118.196,18.805 h1.02 r90
  text "C_12+" at 120.101,18.805 h1.02 r90
  text "C_11+" at 122.006,18.805 h1.02 r90
  text "C_10+" at 123.911,18.805 h1.02 r90
  text "C_9+" at 125.816,18.805 h1.02 r90
  text "C_8+" at 127.721,18.805 h1.02 r90
  text "C_7+" at 129.626,18.805 h1.02 r90
  text "C_6+" at 131.531,18.805 h1.02 r90
  text "C_5+" at 133.436,18.805 h1.02 r90
  text "C_4+" at 135.341,18.805 h1.02 r90
  text "C_3+" at 137.246,18.805 h1.02 r90
  text "C_2+" at 139.151,18.805 h1.02 r90
  text "C_1+" at 141.056,18.805 h1.02 r90
  text "C_0+" at 142.961,18.805 h1.02 r90
  text "C_0-" at 144.866,18.805 h1.02 r90
  text "DANGER / high voltage" at 146.295,17.693 h1.52
  text "DC-" at -2.454,14.042 h1.02 r90
  text "DC-" at -0.867,14.042 h1.02 r90
  text "IN-" at 44.536,14.042 h1.02 r90
  text "OUT-" at 42.948,13.725 h1.02 r90
  text "Fuses / 0.25 A" at 111.052,13.566 h1.02 r90
  text "Fuses / 0.5 A" at 105.178,11.185 h1.02 r90
  text "DC+" at -2.454,10.867 h1.02 r90
  text "DC+" at -0.867,10.867 h1.02 r90
  text "IN+" at 44.536,10.867 h1.02 r90
  text "OUT+" at 42.948,10.232 h1.02 r90
  text "Input Fuses" at 152.327,8.613 h1.52 r90
  text "Fuse / 1.25 A" at 0.086,8.327 h1.02
Bottom Overlay:
  lines w0.203: -4.042,32.775 -4.042,41.665 -0.549,41.665 -0.549,32.775 -4.042,32.775 ; 8.976,7.375 11.516,7.375 11.516,18.805 8.976,18.805 8.976,7.375 ; 13.738,7.375 13.738,17.217 16.278,17.217 16.278,7.375 13.738,7.375 ; 21.041,7.375 21.041,23.25 23.581,23.25 23.581,7.375 21.041,7.375 ; 28.661,7.375 28.661,21.98 31.201,21.98 31.201,7.375 28.661,7.375 ; 36.281,7.375 36.281,21.345 38.821,21.345 38.821,7.375 36.281,7.375 ; 43.583,7.375 43.583,19.757 46.123,19.757 46.123,7.375 43.583,7.375 ; 55.331,7.375 70.571,7.375 70.571,12.454 66.761,12.454 59.141,12.454 58.188,12.455 55.331,12.455 55.331,7.375 ; 83.906,7.375 83.906,12.455 99.146,12.455 99.146,7.375 83.906,7.375 ; 121.688,7.375 121.688,11.502 129.943,11.502 129.943,7.375 121.688,7.375
  text "Extension / Pin Headers" at -3.407,33.397 h1.52 r270
  text "Temperature Sensors / Secondary" at 69.936,8.04 h1.52
  text "Temperature Sensors / Primary" at 98.511,8.04 h1.52
  text "DC Supply OUT" at 9.928,8.01 h1.52 r270
  text "DC Supply IN" at 14.691,8.01 h1.52 r270
  text "isoSPI OUT Secondary" at 21.993,8.01 h1.52 r270
  text "isoSPI IN Secondary" at 29.613,8.01 h1.52 r270
  text "isoSPI OUT Primary" at 37.233,8.01 h1.52 r270
  text "isoSPI IN Primary" at 44.536,8.01 h1.52 r270
  text "Cell Sense / Inputs" at 129.308,8.01 h1.52
Dimension:
  the board outline again, w0.152